# Altium PCB SLT.PcbDoc (part 4 of 8)
Units mm, origin at the board's own origin, x right, y up, seen from the top; angles counter-clockwise.
Board outline 150 x 66 mm, 6 copper layers (L1 TOP, L2 GND 1, L3 SIGNAL, L4 PWR, L5 GND 2, L6 BOT), stack 1.598 mm thick; 797 components, 541 nets, 2680 pads, 2120 vias.
Unrouted connection lines stored in the file: 31.
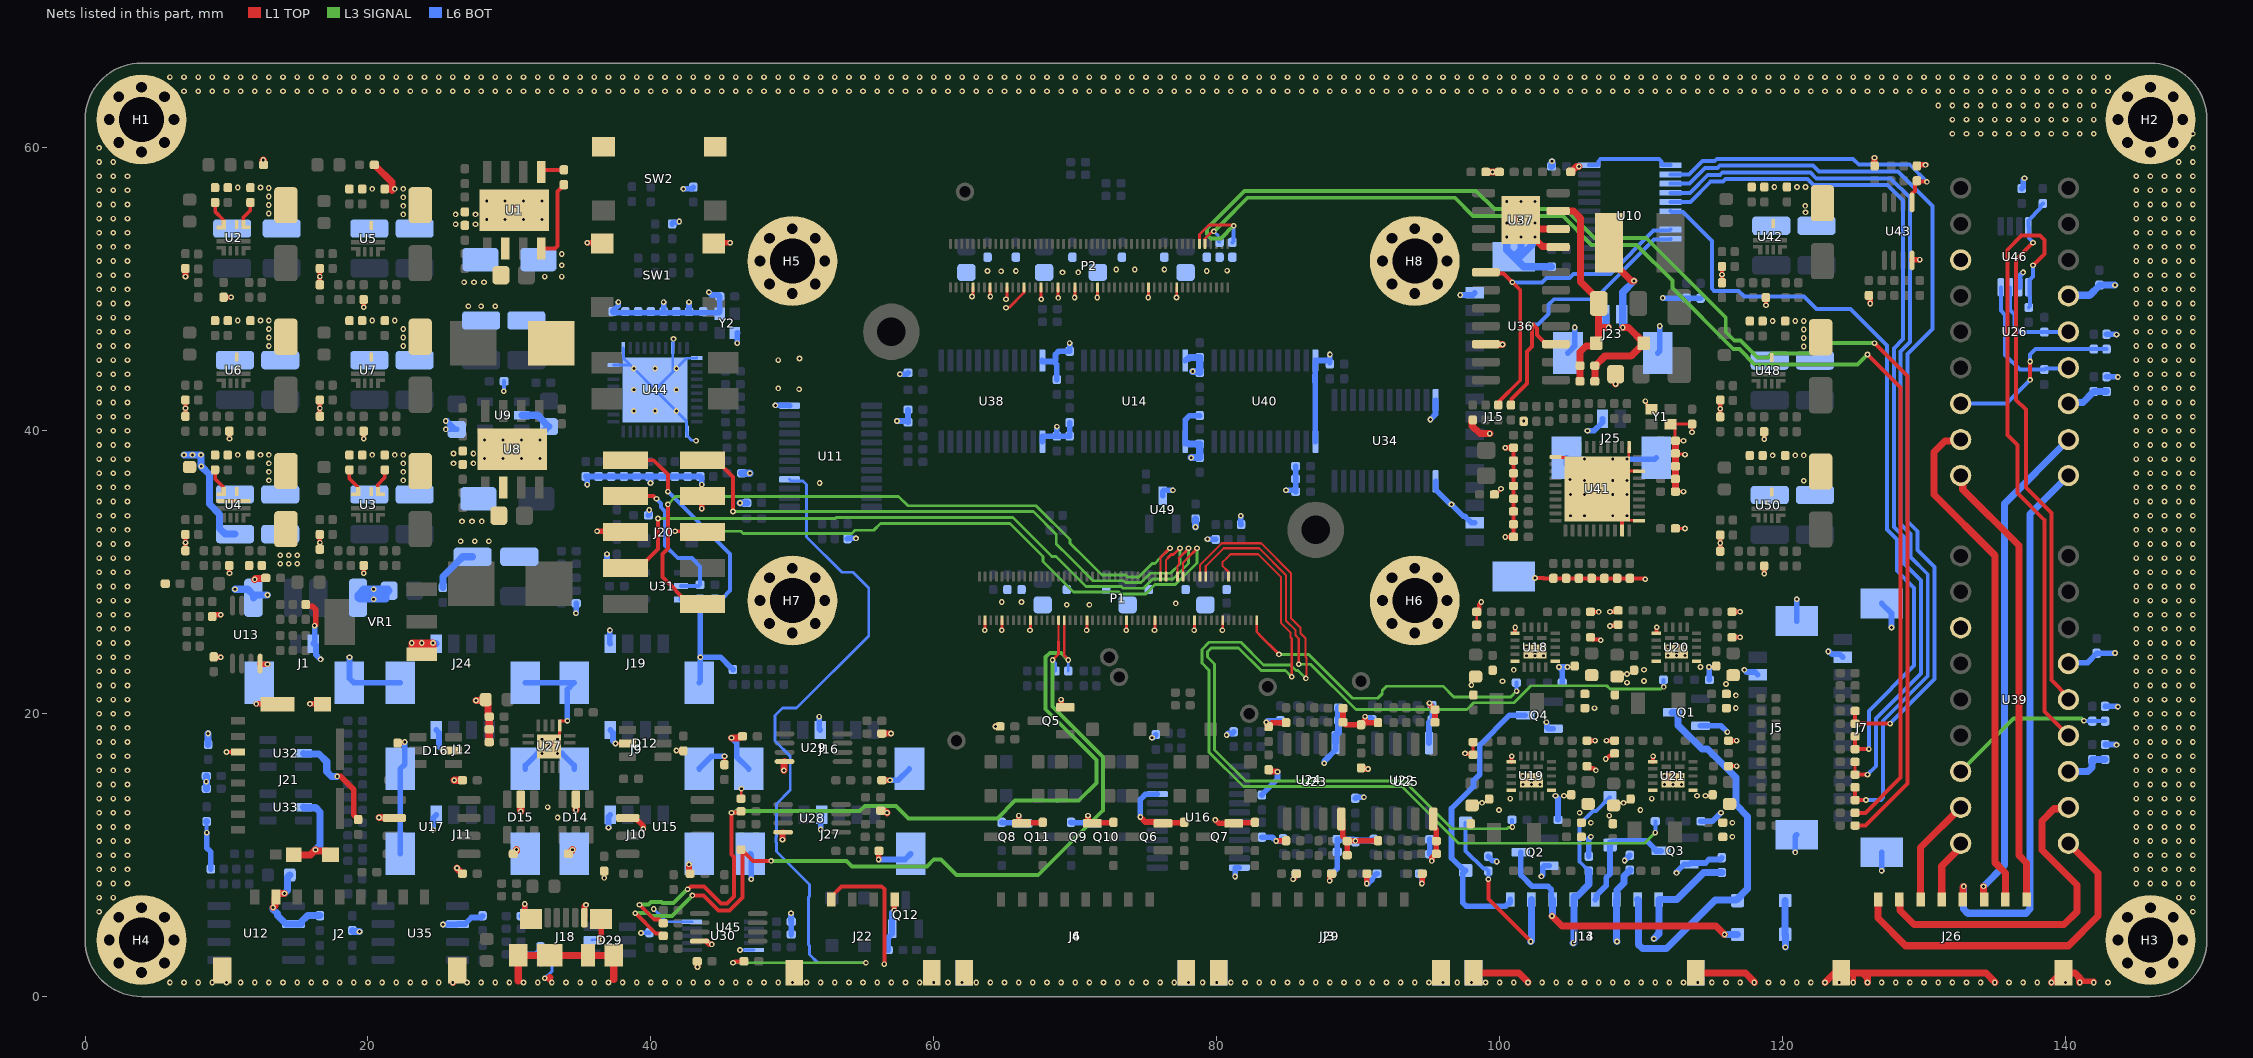
[diagram p8: the nets of this part, all layers, seen from the top]

## Via types
v1: diameter 0.4, hole 0.2, L1 TOP to L6 BOT, tented both sides, 2120 vias

## Nets (pads, with @x,y where several pads share a name; then routed paths per layer and width w, separated by ;. In a path a pad name is that pad's centre, name@x,y a point inside that pad or via, vN(x,y) a via of type N, cw(c..) or ccw(c..) an arc to the next point about the centre after c; other vN are vias at no path point) (continued)
GND: C2.1 C3.2 C4.1 C5.1 C6.1 C7.1 C8.1 C9.1 C10.1 C11.1 C12.1 C13.1 C14.1 C15.1 C16.1 C17.1 C18.1 C19.2 C20.1 C21.1 C22.1 C23.1 C24.1 C25.1 C26.1 C27.1 C29.1 C30.1 C31.1 C32.1 C33.1 C34.1 C35.2 C36.1 C37.2 C38.2 C39.1 C40.1 C41.1 C42.1 C43.1 C44.1 C45.1 C46.1 C47.1 C48.1 C49.1 C50.1 C51.1 C52.1 C53.1 C54.1 C55.1 C56.1 C57.1 C58.1 C59.1 C60.1 C61.1 C62.1 C63.1 C64.1 C65.2 C66.1 C67.1 C68.1 C69.2 C70.1 C71.1 C72.1 C73.1 C74.1 C75.1 C76.1 C77.1 C78.1 C79.1 C80.1 C81.1 C82.1 C83.1 C84.1 C85.1 C86.1 C87.1 C88.1 C89.1 C90.1 C91.1 C92.1 C93.1 C94.1 C95.1 C96.1 C97.1 C98.1 C99.1 C100.1 C101.1 C102.1 C103.1 C104.1 C105.1 C108.1 C109.1 C112.1 C113.1 C114.1 C115.1 C116.1 C117.1 C118.1 C119.1 C120.1 C121.1 C122.1 C123.1 C124.1 C125.1 C126.1 C127.1 C130.1 C131.1 C134.1 C135.1 C136.1 C137.1 C138.1 C139.1 C140.1 C141.1 C142.1 C143.1 C144.1 C145.1 C146.1 C147.1 C148.1 C149.1 C150.1 C151.1 C152.1 C153.1 C154.1 C155.1 C156.1 C157.1 C158.1 C159.1 C160.1 C161.1 C162.1 C163.1 C164.1 C165.1 C166.1 C167.1 C168.1 C169.1 C170.1 C171.1 C172.1 C173.1 C174.1 C175.1 C176.1 C177.1 C178.1 C179.1 C180.1 C181.1 C182.1 C183.1 C184.1 C185.1 C186.1 C187.1 C188.1 C189.1 C190.1 C191.1 C192.1 C193.1 C194.1 C195.1 C196.1 C197.2 C198.1 C199.1 C200.1 C201.1 C202.1 C204.1 C205.1 C206.2 C209.1 C210.1 C211.1 C212.1 C213.1 C214.1 C215.1 C216.1 C226.1 C227.1 C228.1 C229.1 C230.1 C231.1 C232.1 C233.1 C234.1 C235.1 C236.1 C237.1 C238.1 C239.1 C240.1 C241.2 C242.1 C243.1 C244.1 C245.1 C246.1 C247.1 C248.1 C249.1 C250.1 C255.1 C256.1 C257.1 C259.1 C260.2 C261.2 C262.2 C263.2 C264.2 C265.2 C266.2 C267.1 C278.1 C284.1 C285.1 C286.1 C287.1 C288.1 C289.1 C290.1 C291.1 C292.1 C293.1 D2.2 D3.2 D4.2 D5.2 D6.2 D7.2 D8.2 D10.2 D12.2 D13.2 D14.2 D15.2 D16.2 D29.2 D30.2 D31.2 H1.1 H2.1 H3.1 H4.1 H5.1 H6.1 H7.1 H8.1 J1.1 J1.M1 J1.M2 J2.2 J2.M1 J2.M2 J3.M1 J3.M2 J4.M1 J4.M2 J5.2 J5.M1 J5.M2 J6.M1 J6.M2 J7.2 J7.M1 J7.M2 J9.4 J9.M1 J9.M2 J10.4 J10.M1 J10.M2 J11.4 J11.M1 J11.M2 J12.4 J12.M1 J12.M2 J13.M1 J13.M2 J14.M1 J14.M2 J15.1 J15.14 J15.M1 J15.M2 J16.4 J16.M1 J16.M2 J18.5 J18.6 J19.4 J19.M1 J19.M2 J20.4 J20.8 J21.G1 J21.G2 J21.G3 J21.G4 J21.P6 J22.4 J22.M1 J22.M2 J23.M1 J23.M2 J24.4 J24.M1 J24.M2 J25.2 J25.M1 J25.M2 J26.M1 J26.M2 J27.4 J27.M1 J27.M2 J29.M1 J29.M2 P1.4 P1.10 P1.20 P1.40 P1.54 P1.64 P1.78 P1.88 P2.10 P2.16 P2.22 P2.28 P2.34 P2.40 P2.46 P2.54 P2.72 P2.82 Q1.2 Q2.2 Q3.2 Q4.2 Q5.2 Q6.2 Q7.2 Q8.2 Q9.2 Q10.2 Q11.2 Q12.2 R7.1 R8.1 R9.1 R10.1 R20.1 R22.2 R23.1 R24.2 R25.1 R26.1 R32.2 R34.1 R39.1 R40.2 R41.1 R42.1 R48.2 R49.1 R52.1 R53.1 R54.1 R56.1 R81.1 R108.1 R115.2 R116.2 R117.2 R118.2 R120.2 R121.2 R122.2 R135.2 R136.2 R137.2 R138.2 R145.2 R146.2 R147.2 R148.2 R151.1 R152.1 R155.1 R156.1 R161.1 R162.1 R167.1 R168.1 R173.1 R174.1 R179.1 R180.1 R183.1 R184.1 R187.1 R188.1 R202.1 R203.1 R204.1 R205.1 R206.1 R210.1 R211.1 R212.1 R221.2 R224.2 R225.1 R228.1 R229.1 R231.1 R244.1 R259.2 R263.2 R269.1 R274.2 R276.2 R283.2 R285.2 R306.1 R307.2 R308.1 R314.2 R320.2 R321.2 R329.1 R330.2 R331.1 R337.1 R338.2 R339.1 R341.2 R342.2 R344.2 R345.2 R346.2 R347.2 R356.1 SW1.1 SW1.3 SW2.1 SW2.3 U1.6 U1.9 U2.8 U3.8 U4.8 U5.8 U6.8 U7.8 U8.6 U8.9 U9.2 U10.12 U10.13 U11.12 U12.2 U13.4 U14.12 U14.13 U15.6 U16.12 U16.21 U17.6 U18.1 U18.5 U18.10 U18.21 U18.22 U19.1 U19.5 U19.10 U19.21 U19.22 U20.1 U20.5 U20.10 U20.21 U20.22 U21.1 U21.5 U21.10 U21.21 U21.22 U22.4 U23.4 U24.4 U25.4 U26.3 U26.15 U27.1 U27.17 U28.4 U29.4 U30.5 U30.10 U31.3 U32.2 U33.2 U34.12 U34.13 U35.2 U36.12 U37.1 U37.2 U37.EPAD U38.12 U38.13 U39.3 U39.15 U40.12 U40.13 U41.1 U41.8 U41.11 U41.21 U41.39 U41.41 U42.8 U43.4 U44.1 U44.8 U44.11 U44.21 U44.39 U44.41 U45.4 U46.6 U48.8 U49.3 U50.8 VR1.1 Y1.2 Y1.4 Y2.2 Y2.4 | length 530.8
  L1 TOP w0.2: v1(32.8,17.7) 33.55,18.45 33.55,19.455 33.58,19.485 34.085,19.485 v1(34.1,19.5) ; v1(36.7,8.4) C92.1@36.7,8.875 ; v1(37.5,17.9) D12.2@38.345,17.9 ; R117.2@45.2,16.4 v1(45.2,17) ; C188.1@46.375,14 46.388,14.012 46.388,14.688 v1(46.4,14.7) ; v1(62.7,49.5) 62.7,49.554 62.779,49.633 P2.10@62.779,50.14 ; v1(63.6,25.9) 63.625,25.925 P1.4@63.625,26.61 ; P2.16@63.979,50.14 63.979,49.521 v1(64,49.5) ; v1(64.8,25.9) 64.825,25.925 P1.10@64.825,26.61 ; v1(65.1,48.7) 65.138,48.738 65.352,48.738 66.379,49.766 P2.28@66.379,50.14 ; v1(65.1,49.3) 65.1,49.354 65.179,49.433 P2.22@65.179,50.14 ; v1(66.8,25.9) 66.825,25.925 P1.20@66.825,26.61 ; P2.34@67.579,50.14 67.579,49.321 v1(67.6,49.3) ; P2.40@68.779,50.14 68.779,49.421 v1(68.8,49.4) ; v1(69.954,49.43) 69.979,49.455 P2.46@69.979,50.14 ; v1(70.8,25.9) 70.825,25.925 P1.40@70.825,26.61 ; v1(71.554,49.43) 71.579,49.455 P2.54@71.579,50.14 ; v1(73.6,25.9) 73.625,25.925 P1.54@73.625,26.61 ; v1(75.154,49.43) 75.179,49.455 P2.72@75.179,50.14 ; v1(75.6,25.9) 75.625,25.925 P1.64@75.625,26.61 ; v1(77.154,49.43) 77.179,49.455 P2.82@77.179,50.14 ; v1(78.4,25.9) 78.425,25.925 P1.78@78.425,26.61 ; v1(80.4,25.9) 80.425,25.925 P1.88@80.425,26.61 ; C115.1@98.125,17.1 R138.2@98.125,18 ; C114.1@98.375,26.3 R136.2@98.375,27.2 ; C205.1@99.675,35.425 99.675,35.427 100.1,35.852 v1(100.1,35.9) ; U41.21@103.955,38.15 103.98,38.125 104.675,38.125 U41.41@106.9,35.9 ; U41.41@109.125,38.125 109.125,38.82 U41.11@109.15,38.845 ; U41.1@109.555,33.65 U41.1@109.845,33.65 109.82,33.675 109.125,33.675 108.65,34.15 U41.41@106.9,35.9 ; U41.8@109.845,37.15 108.15,37.15 U41.41@106.9,35.9 ; v1(110.3,42.1) 110.3,42.046 110.4,41.946 110.4,41.8 Y1.2@110.625,41.575 ; Y1.2@110.65,41.6 110.675,41.625 Y1.2@110.725,41.625 ; Y1.4@112.075,40.575 112.4,40.25 112.4,39.325 C181.1@112.425,39.3 v1(113,39.3) ; Y1.4@112.175,40.475 113.575,40.475 113.6,40.5 v1(113.6,39.9) ; C213.1@112.425,33.1 v1(113.1,33.1) ; C242.1@112.425,35.7 v1(113,35.7) ; C211.1@112.425,38.4 112.467,38.358 113.062,38.358 v1(113.1,38.32)
  L1 TOP w0.28: v1(10,17.3) J21.P6@10.802,17.3 ; v1(100.4,32.5) C77.1@100.975,32.5 C212.1@100.975,38.8 ; v1(102.5,29.6) 103.1,29.6 103.125,29.575 C76.1@103.8,29.575 C239.1@106.5,29.575 C236.1@107.4,29.575 C231.1@108.3,29.575 C230.1@109.2,29.575 110.193,29.575 110.26,29.508 v1(110.292,29.508) ; U41.39@108.65,32.955 U41.41@108.65,34.15
  L1 TOP w0.3: R23.1@7.1,31.525 v1(7.1,32.1) C21.1@7.1,32.575 ; R39.1@7.1,41.025 v1(7.1,41.6) C2.1@7.1,42.075 ; R7.1@9.793,49.44 v1@10.325,49.44 ; R24.2@10.2,30.475 10.204,30.471 10.204,29.939 v1(10.208,29.935) ; R40.2@10.2,39.975 10.204,39.971 10.204,39.439 v1(10.208,39.435) ; R20.1@16.6,31.625 v1(16.6,32.1) C18.1@16.6,32.575 ; R49.1@16.6,41.025 v1(16.6,41.6) C29.1@16.6,42.075 ; R34.1@16.6,50.325 v1(16.6,50.9) C240.1@16.6,51.375 ; R22.2@19.7,30.475 19.704,30.471 19.704,29.939 v1(19.708,29.935) ; R48.2@19.7,39.975 19.704,39.971 19.704,39.439 v1(19.708,39.435) ; R32.2@19.7,49.275 19.704,49.271 19.704,48.739 v1(19.708,48.735) ; C90.1@22.1,17.925 22.156,17.981 22.581,17.981 v1(22.6,18) ; v1(41.8,17.4) 41.813,17.387 42.287,17.387 C71.1@42.3,17.375 ; v1(97.55,17.2) 97.569,17.181 98.044,17.181 C115.1@98.125,17.1 ; R136.2@98.375,27.2 98.4,27.2 98.55,27.35 98.55,27.723 98.7,27.873 v1(98.7,27.9) ; U19.1@100.825,16.6 100.837,16.612 100.837,16.988 v1(100.85,17) ; U18.1@101.075,25.7 101.088,25.712 101.088,26.088 v1(101.1,26.1) ; R137.2@106.175,16.3 106.325,16.15 106.623,16.15 106.773,16 v1(106.8,16) ; C109.1@106.175,18.1 v1(106.75,18.1) ; R135.2@106.425,25.4 106.575,25.25 107.073,25.25 107.123,25.2 v1(107.15,25.2) ; C108.1@106.425,27.2 v1(107,27.2) ; v1(107.5,16.8) 107.527,16.8 107.777,17.05 107.975,17.05 C137.1@108.125,17.2 ; v1(107.55,18.1) R148.2@108.125,18.1 ; v1(107.8,26.2) 107.819,26.219 108.284,26.219 C136.1@108.375,26.31 ; v1(107.8,27.21) R146.2@108.375,27.21 ; U21.1@110.825,16.6 110.837,16.612 110.837,16.988 v1(110.85,17) ; U20.1@111.075,25.71 111.088,25.722 111.088,26.098 v1(111.1,26.11) ; R329.1@115.592,40.99 v1(115.592,41.565) C291.1@115.592,42.04 ; R337.1@115.593,31.49 v1(115.593,32.065) C286.1@115.593,32.54 ; R306.1@115.717,50.466 v1(115.717,51.041) C232.1@115.717,51.516 ; R147.2@116.175,16.3 v1(116.75,16.3) ; C131.1@116.175,18.1 v1(116.75,18.1) ; R145.2@116.425,25.41 v1(117,25.41) ; C130.1@116.425,27.21 v1(117,27.21) ; R330.2@118.692,39.94 118.696,39.936 118.696,39.404 v1(118.7,39.4) ; R338.2@118.693,30.44 118.697,30.436 118.697,29.904 v1(118.701,29.9) ; R307.2@118.817,49.416 118.821,49.412 118.821,48.88 v1(118.825,48.876)
  L1 TOP w0.4: v1(7.1,50.9) C237.1@7.1,51.475 ; C69.2@9,26.875 9,26.9 9.1,27 v1(9.6,27) ; C68.1@9.1,24.025 9.125,24 v1(9.6,24) ; v1(12.1,20.7) 13.582,20.7 J21.G4@13.607,20.675 ; U13.4@12.375,23.55 12.375,23.525 12.4,23.5 v1(12.9,23.5) ; R108.1@15.6,27.725 15.6,27.705 15.7,27.605 16.066,27.605 16.3,27.371 16.3,26.302 v1(16.231,26.233) ; v1(15.9,20.7) 16.767,20.7 J21.G3@16.792,20.675 ; v1(17.827,15.573) 18.074,15.573 19,14.648 19,12.85 19.3,12.55 C91.1@19.3,12.525 ; v1(31.08,6.556) 31.08,5.928 J18.6@31.512,5.495 ; J18.5@35.3,5.58 35.313,5.593 35.313,6.391 v1(35.411,6.489) ; v1(35.5,53.3) 36.5,53.3 SW1.1@36.55,53.25 ; v1(36.2,32.9) 38.14,32.9 J20.8@38.2,32.84 ; J18.6@36.487,5.495 36.487,4.134 v1(36.582,4.04) ; U15.6@38.365,12.635 38.89,12.635 39.471,12.054 39.471,11.853 v1(39.469,11.85) ; v1(42.7,9.35) 42.7,8.775 R118.2@42.775,8.7 ; R274.2@43.275,2.5 43.3,2.475 v1(43.3,2.1) ; v1(43.6,34.5) 43.6,35.319 J20.4@43.661,35.38 ; U45.4@43.95,3.9 44.15,3.7 v1(44.3,3.7) ; SW1.3@44.45,53.25 44.5,53.3 v1(45.6,53.3) ; v1(49.3,11.1) 49.3,11.6 49.325,11.625 U28.4@49.35,11.625 ; v1(56.1,9.7) 56.1,10.275 R221.2@56.125,10.3 ; R224.2@56.325,15.3 v1(56.9,15.3) ; C227.1@56.325,18.6 v1(56.975,18.6) ; v1(57.2,6.1) 57.2,6.82 J22.4@57.25,6.87 ; v1(64.354,19.1) R202.1@64.675,19.1 ; v1(66,12.8) 66,12.35 66.1,12.25 Q8.2@66.2,12.25 66.238,12.288 67.662,12.288 R205.1@67.7,12.325 ; v1(69,21) 69,20.55 69.1,20.45 Q5.2@69.3,20.45 ; v1(70.9,12.8) 70.9,12.35 71,12.25 Q9.2@71.2,12.25 71.238,12.288 72.663,12.288 R206.1@72.7,12.325 ; v1(74.6,12.7) 74.95,12.35 76.1,12.35 Q6.2@76.2,12.25 76.238,12.288 77.662,12.288 R203.1@77.7,12.325 ; v1(79.9,12.5) 80.15,12.25 Q7.2@81.2,12.25 81.238,12.287 82.663,12.287 R204.1@82.7,12.325 ; v1(83.5,19.4) 83.565,19.335 83.565,19.19 C151.1@83.665,19.09 ; C143.1@83.665,16.04 83.665,16.015 83.765,15.915 84.29,15.915 v1(84.3,15.905) ; C151.1@83.665,19.115 83.925,19.375 C157.1@84.9,19.375 ; v1(84.2,11) 84.225,11.025 C149.1@84.9,11.025 ; v1(85.4,8.3) 85.5,8.4 85.5,8.6 85.6,8.7 C158.1@85.625,8.7 ; v1(87.98,8.2) 87.98,8.38 88,8.4 88,8.6 88.1,8.7 C166.1@88.125,8.7 ; U23.4@88.805,12.565 88.9,12.47 88.9,11.325 C148.1@89.1,11.125 ; R168.1@88.925,20.4 C156.1@88.925,19.4 88.95,19.4 89.125,19.225 C153.1@90.2,19.225 90.2,19.25 C153.1@90.325,19.375 ; R162.1@89.225,10 C148.1@89.225,11 89.238,11.013 v1(89.8,11.013) 91.387,11.013 C165.1@91.4,11.025 ; C145.1@90.2,16.175 90.275,16.1 v1(90.7,16.1) ; v1(90.49,19.8) 90.49,19.54 C153.1@90.325,19.375 ; v1(90.6,8) 90.6,8.675 C142.1@90.625,8.7 ; C173.1@91.4,19.375 C153.1@90.325,19.375 ; v1(94.5,8) 94.525,8.025 C150.1@94.525,8.7 ; v1(95.043,20.75) 95.1,20.693 95.1,20.6 95.4,20.3 R180.1@95.425,20.3 C172.1@95.425,19.4 ; v1(95.2,9.6) 95.2,9.8 95.5,10.1 R174.1@95.525,10.1 C164.1@95.525,11 95.525,11.82 95.305,12.04 U25.4@95.305,12.565 ; v1(100.4,38.8) C212.1@100.975,38.8 ; C199.1@101.7,40.675 v1(101.7,40.7) ; v1(125,1) 125,1.68 ; C234.1@126.1,49.575 126.2,49.475 v1(126.2,49) ; C235.1@126.5,58.725 v1(126.5,59.3) ; U43.4@129.15,52.05 129.15,52.075 129.175,52.1 v1(129.7,52.1) ; R122.2@129.5,58.725 129.575,58.8 v1(130.1,58.8) ; 140.855,1.525 141.28,1.1 142,1.1 v1(142,1)
  L1 TOP w0.5: v1(12,29.5) 12.05,29.55 12.725,29.55 R54.1@12.775,29.6 ; v1(12.6,59.14) 12.6,58.825 R356.1@12.625,58.8 ; v1(13.3,6.3) 13.42,6.42 13.42,6.962 J2.2@13.5,7.042 13.5,7.22 13.58,7.3 v1(14.1,7.3) ; J21.G1@14.752,10.025 15.925,10.025 v1(16.29,10.39) 16.384,10.296 17.092,10.296 J21.G2@17.362,10.025 ; R9.1@20.45,58.8 20.475,58.8 21.7,57.575 21.7,57 ; v1(20.776,12.665) 21.835,12.665 U17.6@21.865,12.635 ; v1(25.3,17.4) D16.2@26.055,17.4 ; v1(26,1) 26,1.05 J2.M1@26.06,1.05 ; v1(26.1,15.3) R120.2@26.675,15.3 ; v1(26.3,9.1) 26.3,9.05 26.65,8.7 R121.2@26.675,8.7 ; v1(27.639,20.939) 28.264,20.939 C81.1@28.325,21 28.325,20.95 28.5,20.775 28.5,19.85 28.55,19.8 C82.1@28.575,19.8 R115.2@28.575,18.9 R116.2@28.575,18 ; C80.1@30.275,10.1 30.3,10.1 30.496,10.296 v1(30.496,10.396) ; 30.6,1.1 30.625,1.125 J18.6@30.625,2.92 J18.6@32.85,2.92 J18.6@35.549,2.92 J18.6@37.375,2.92 37.375,1.225 37.4,1.2 ; v1(30.8,13.1) D15.2@30.8,13.955 ; 32.8,1.3 32.85,1.35 ; C74.1@34.175,10.1 v1(34.465,10.39) ; v1(34.7,13.2) D14.2@34.7,13.955 ; v1(45.7,18.3) 46.191,18.3 46.241,18.35 46.425,18.35 C187.1@46.475,18.4 ; v1(49.4,16) 49.4,16.575 U29.4@49.45,16.625 ; C191.1@56.25,13.15 56.3,13.1 56.6,13.1 v1(56.7,13) ; C204.1@98,40.675 98.05,40.625 98.05,40.351 98.601,39.8 v1(99.3,39.8) ; J14.M1@98.145,1.68 101.37,1.68 102,1.05 v1(102,1) ; U36.12@99.025,46.13 99.055,46.1 v1(100.2,46.1) ; C228.1@99.025,58.3 v1(99.5,58.3) C209.1@99.975,58.3 ; v1(101.5,54.7) 101.5,54.557 101.657,54.4 101.8,54.4 v1(102.5,53.7) ; U37.EPAD@101.5,54.9 102.135,54.265 U37.2@104.135,54.265 ; U37.EPAD@102.6,53.8 102.6,53.457 103.027,53.03 104.1,53.03 U37.1@104.135,52.995 ; R269.1@105.025,58.3 105.05,58.3 105.43,58.68 v1(105.6,58.68) ; v1(108.2,43.3) C206.2@108.2,44 ; C242.1@112.425,35.7 C211.1@112.425,38.4 C181.1@112.425,39.3 ; J14.M2@113.855,1.68 117.37,1.68 118,1.05 v1(118,1) ; v1(123,1) 123.68,1.68 J26.M1@124.145,1.68 125,1.68 125.663,1.68 ; v1(126,1) 126,1.343 125.663,1.68 ; v1(135,1) 135,1.05 134.37,1.68 125.663,1.68 ; v1(139,1) 139.68,1.68 J26.M2@139.855,1.68 140.664,1.68 141,1.343 v1(141,1) ; 23.1,24.7 v1(23.1,25) v1(23.8,25) ; 23.1,24.7 23.8,24.7 ; 23.1,24.7 23.1,24.425 23.325,24.2 VR1.1@23.8,24.2 ; VR1.1@23.8,24.2 24.375,24.2 24.6,24.425 24.6,24.7 ; VR1.1@23.8,24.2 23.8,24.7 ; 23.8,24.7 24.6,24.7 ; 23.8,24.7 v1(23.8,25) ; v1(23.8,25) v1(24.6,25) 24.6,24.7
  L6 BOT w0.2: R228.1@30.825,3 30.925,3.1 31.8,3.1 32.2,3.5 R225.1@32.2,3.525 32.293,3.432 32.668,3.432 33,3.1 33,1.8 v1(32.5,1.3) ; D29.2@35.845,4 35.865,4.02 36.562,4.02 v1(36.582,4.04) ; U44.39@37.355,44.65 U44.41@38.55,44.65 ; U44.1@38.05,45.845 38.075,45.82 38.075,45.125 U44.41@38.55,44.65 ; v1(40.2,6.193) 41.093,5.3 U30.10@42.9,5.3 ; v1(41.6,46.5) 41.575,46.475 41.575,45.87 U44.8@41.55,45.845 U44.41@41.55,44.15 ; v1(43.2,39.3) 43.162,39.338 42.877,39.338 42.55,39.665 U44.21@42.55,39.955 42.525,39.98 42.525,40.675 v1(40.3,42.9) ; U44.11@43.245,45.15 43.22,45.125 42.525,45.125 U44.41@41.55,44.15 ; v1(46.3,3.3) U30.5@47.3,3.3 ; U44.41@38.55,44.65 v1(38.8,44.4) v1(40.3,42.9) ; v1(40.3,42.9) U44.41@41.55,44.15
  L6 BOT w0.28: v1(8.6,11.6) C192.1@8.6,12.375 ; U10.12@106.33,58.775 106.91,58.775 106.975,58.84 106.975,59.036 107.139,59.2 111.261,59.2 111.425,59.036 111.425,58.84 111.49,58.775 U10.13@112.07,58.775
  L6 BOT w0.3: v1(29.6,42.8) 29.612,42.813 29.612,43.487 C6.1@29.625,43.5 ; v1(39.3,4.5) 39.312,4.512 39.887,4.512 C10.1@39.9,4.525
  L6 BOT w0.4: v1(8.6,11.6) 8.6,10.525 8.9,10.225 R263.2@8.9,9.025 ; J1.1@16.125,24.95 J1.1@16.175,25 ; v1(16.231,26.233) 16.231,25.056 J1.1@16.175,25 ; v1(16.654,23.846) 16.325,24.175 16.325,24.85 J1.1@16.175,25 ; v1(18.7,24) 18.7,22.5 19,22.2 J24.M2@22.275,22.2 ; J11.M2@22.275,10.1 J12.M2@22.275,16.1 22.6,16.425 v1(22.6,18) ; v1(24.6,11.8) 24.625,11.825 24.625,12.65 J11.4@24.825,12.85 ; J12.4@24.825,18.85 25.025,18.65 25.025,17.675 v1(25.3,17.4) ; v1(25.3,5.1) 26.3,5.1 U35.2@26.335,5.135 26.86,5.135 27.325,5.6 28,5.6 28.1,5.7 C178.1@28.1,5.725 ; v1(25.5,40.1) C38.2@26.275,40.1 26.198,40.1 25.598,40.7 v1(25.5,40.7) ; R229.1@30.825,5.7 30.85,5.7 30.95,5.8 30.95,6.072 31.08,6.202 v1(31.08,6.556) ; J12.M1@31.125,16.1 31.125,16.35 31.975,17.2 v1(32.3,17.2) v1(32.8,17.7) ; J24.M1@31.125,22.2 J19.M2@34.575,22.2 34.1,21.725 v1(34.1,19.5) ; v1(32.3,18.2) v1(32.8,17.7) ; v1(33.4,18.2) 32.9,17.7 v1(32.8,17.7) ; J9.M2@34.575,16.1 34.575,16.35 33.725,17.2 v1(33.4,17.2) 33.3,17.2 v1(32.8,17.7) ; v1(34.7,27.1) 34.725,27.125 C267.1@34.725,27.8 ; v1(35.5,36.2) 35.5,36.675 C85.1@35.4,36.775 C86.1@37.2,36.775 C246.1@43.5,36.775 43.6,36.675 v1(43.6,36.2) ; v1(36.9,31.285) 36.9,30.872 36.95,30.822 36.95,30.125 37.05,30.025 C197.2@37.075,30.025 ; v1(37,11.95) 37,12.725 J10.4@37.125,12.85 ; v1(37.1,25.9) 37.1,24.975 J19.4@37.125,24.95 ; J9.4@37.125,18.85 37.325,18.65 37.325,18.075 v1(37.5,17.9) ; v1(37.7,49.1) 37.7,48.85 37.3,48.45 C245.1@37.3,48.425 37.375,48.35 44.8,48.35 44.875,48.425 C184.1@44.875,49.5 44.775,49.6 44.3,49.6 v1(44.1,49.8) ; C190.1@39.825,34.025 39.881,34.081 v1(39.881,34.408) ; C89.1@39.9,36.775 39.969,36.706 v1(39.969,36.314) ; C248.1@40.9,48.425 v1(40.9,49.1) ; C39.1@41.5,54.625 41.5,54.65 41.6,54.75 41.95,54.75 v1(42,54.8) ; U31.3@42.14,28.085 42.143,28.088 43.438,28.088 43.5,28.027 v1(43.5,24) ; v1(42.3,57.1) 42.9,57.1 43,57.2 C40.1@43,57.225 ; C243.1@42.7,48.425 v1(42.7,49.1) ; J9.M1@43.425,16.1 43.425,16.15 44.275,17 v1(45.2,17) ; J19.M1@43.425,22.2 43.5,22.275 v1(43.5,24) ; v1(45.7,18.3) 46.075,17.925 46.075,16.95 J16.M1@46.925,16.1 ; C278.1@45.8,23.125 45.8,23.15 45.7,23.25 45.675,23.25 44.925,24 v1(43.5,24) ; v1(46.1,46.2) 46.1,46.9 Y2.2@46.125,46.925 ; J27.M1@47.025,10.1 47.1,10.025 v1(47.1,8.3) ; v1(48.8,41.8) 49.775,41.8 U11.12@49.8,41.775 ; v1(49.9,5.9) 49.9,5.325 C189.1@49.925,5.3 R231.1@49.925,4.4 ; v1(51.9,19.8) 51.9,18.925 J16.4@51.975,18.85 ; v1(52,11.82) 52,12.775 J27.4@52.075,12.85 ; C64.1@53.9,32.375 53.925,32.4 v1(54.5,32.4) ; v1(56.1,9.7) 57.975,9.7 J27.M2@58.375,10.1 ; R212.1@56.775,3.3 56.775,4.165 57.05,4.44 Q12.2@57.05,4.8 57.05,5.95 v1(57.2,6.1) ; v1(56.9,15.3) 57.475,15.3 J16.M2@58.275,16.1 ; v1(57.4,40.7) 58.075,40.7 C201.1@58.175,40.6 R342.2@58.175,41.5 ; v1(57.6,44) 58.075,44 C183.1@58.175,44.1 ; R211.1@64.8,12.325 64.838,12.287 66,12.287 v1(66,12.8) ; U38.13@67.675,39.23 67.675,39.62 67.68,39.625 R314.2@68.7,39.625 ; U38.12@67.675,44.97 67.675,44.905 67.68,44.9 68.466,44.9 ; v1(68.7,40.3) R314.2@68.7,39.625 ; R344.2@68.7,43.625 68.7,44.666 68.466,44.9 ; R320.2@69.6,40.575 C41.1@69.6,39.625 R314.2@68.7,39.625 ; v1(69.6,46.2) C27.1@69.6,45.625 68.834,45.625 68.6,45.391 68.6,45.034 68.466,44.9 ; R210.1@69.7,12.325 69.738,12.288 Q10.2@70.962,12.288 ; v1(70.9,12.8) 70.9,12.35 Q10.2@70.962,12.288 ; Q10.2@71.2,12.25 71,12.25 Q10.2@70.962,12.288 ; v1(74.6,12.7) 74.6,13.95 74.95,14.3 75.775,14.3 U16.21@75.8,14.325 ; v1(75.42,18.3) 75.5,18.3 75.7,18.5 C70.1@75.7,18.525 ; U49.3@76.175,35.421 76.175,35.7 76.275,35.8 v1(76.9,35.8) ; U14.12@77.775,44.97 77.9,45.095 U14.12@77.9,45.1 ; 78.025,39.075 77.78,39.075 77.775,39.08 U14.13@77.775,39.23 77.775,40.775 78.075,41.075 R347.2@78.8,41.075 ; v1(79.343,32.343) 79.903,32.343 C229.1@79.921,32.325 ; v1(80.7,18.5) 80.8,18.6 81.1,18.6 81.2,18.7 C72.1@81.2,18.725 ; v1(81.3,8.5) 81.3,9.1 81.325,9.125 U16.12@81.6,9.125 ; v1(81.7,34) 81.7,33.396 R276.2@81.721,33.375 ; C159.1@83.195,14.26 83.195,14.285 84.3,15.39 v1(84.3,15.905) ; C169.1@83.2,11.275 83.925,11.275 v1(84.2,11) 84.535,11 84.57,11.035 84.595,11.035 84.695,11.135 C171.1@84.695,11.16 ; v1(83.5,19.4) 83.61,19.51 C163.1@84.495,19.51 ; v1(84.9,35.8) 85.475,35.8 C210.1@85.575,35.7 R321.2@85.575,36.6 R341.2@85.575,37.5 ; v1(85.4,8.3) 85.5,8.4 85.5,8.6 85.6,8.7 C144.1@85.625,8.7 ; U40.13@86.975,39.23 86.975,43.447 86.95,43.472 86.95,43.928 86.975,43.953 U40.12@86.975,44.97 87.88,44.97 87.9,44.95 87.9,44.925 88,44.825 v1(88,45.4) ; v1(87.6,16.5) 87.6,16.645 88.4,17.445 U24.4@88.4,17.97 ; v1(87.98,8.2) 87.98,8.555 88,8.575 88,8.6 88.1,8.7 C168.1@88.125,8.7 88.15,8.7 88.52,9.07 R179.1@88.52,10.235 C170.1@88.52,11.135 89.64,11.135 89.763,11.013 v1(89.8,11.013) 89.825,11.038 91.013,11.038 C155.1@91.1,11.125 ; C161.1@89.8,14.025 89.875,14.1 v1(90.4,14.1) ; v1(90.49,19.8) 90.59,19.7 90.9,19.7 91,19.6 C147.1@91,19.575 ; v1(90.6,8) 90.7,8 91,8.3 91,8.4 91.3,8.7 C160.1@91.325,8.7 ; C152.1@94.325,8.7 94.35,8.7 94.45,8.6 94.45,8.575 94.5,8.525 v1(94.5,8) ; U22.4@95.005,17.935 C146.1@95.005,19.405 ; C154.1@95.05,11.125 R167.1@95.05,10.075 95.075,10.075 95.175,9.975 95.175,9.95 95.2,9.925 v1(95.2,9.6) ; v1(95.1,40.8) 95.47,41.17 95.47,42.165 U34.12@95.475,42.17 ; C146.1@95.225,19.6 R161.1@95.225,20.6 ; U34.13@95.475,36.43 95.475,35.85 96.525,34.8 v1(96.6,34.8) 96.6,34.784 97.434,33.95 97.55,33.95 98,33.5 J15.14@98.25,33.5 ; v1(97.21,49.6) 98.1,49.6 J15.1@98.25,49.75 ; C141.1@99.2,9.925 99.2,9.9 99.5,9.6 99.75,9.6 v1(99.8,9.55) ; v1(102.95,8.503) 103.05,8.603 103.05,9.15 103.15,9.25 Q2.2@103.5,9.25 ; v1(103.301,19.398) 103.34,19.359 103.34,19.05 103.44,18.95 Q4.2@103.8,18.95 ; v1(103.95,14.2) 104.125,14.025 R152.1@104.125,12.5 ; R156.1@104.425,22.2 104.425,23.075 v1(104.2,23.3) v1(104.8,23.3) ; J23.M1@104.825,45.5 105.31,45.985 v1(105.31,47.3) ; v1(106,36.5) 105.875,36.5 104.725,37.65 J25.M1@104.725,38.1 104.825,38 v1(106,38) ; v1(106.213,40.004) 106.679,40.004 107.275,40.6 J25.2@107.275,40.85 ; C139.1@106.3,9.925 106.3,11.15 v1(106.45,11.3) ; v1(108.833,9.63) 108.878,9.675 108.9,9.675 109.2,9.975 C140.1@109.2,10 ; v1(109,38) 110.975,38 J25.M2@111.075,38.1 ; J23.M2@111.175,45.5 111.315,45.64 v1(111.315,47.415) ; v1(111.525,49.4) 111.55,49.375 C62.1@113.2,49.375 R283.2@114.2,49.375 ; v1(112.5,8.75) 112.5,8.81 113.04,9.35 Q3.2@113.4,9.35 113.5,9.45 114.55,9.45 114.8,9.7 115.6,9.7 115.7,9.8 C138.1@115.7,9.825 ; Q1.2@114.2,19.15 115.65,19.15 v1(116.1,18.7) ; R155.1@114.225,12.4 115.05,12.4 v1(115.65,13) ; v1(114.8,23.31) 114.825,23.285 R151.1@114.825,22.4 ; v1(117.3,23.1) 117.45,22.95 118.05,22.95 J5.2@118.25,22.75 ; v1(120.9,10.2) 120.9,11.35 J5.M1@121,11.45 ; J5.M2@121,26.55 v1(121,28.1) ; v1(123.23,24.4) 123.308,24.4 123.508,24.2 124.05,24.2 J7.2@124.25,24 ; v1(127,8.9) J7.M1@127,10.2 ; J7.M2@127,27.8 127.7,27.1 v1(127.7,26.1) ; U46.6@136.725,50.147 136.746,50.169 136.746,50.946 v1(137,51.2) ; C200.1@136.9,57.125 137,57.225 137,57.76 v1(137.1,57.86) ; U39.15@140.21,23.54 140.28,23.61 141.56,23.61 142.2,24.25 C174.1@142.2,24.275 143.475,24.275 v1(143.5,24.3) ; R187.1@142.8,17.825 143.575,17.825 v1(143.6,17.8) ; R183.1@142.8,20.525 143.675,20.525 v1(143.7,20.5) ; R184.1@142.9,43.825 143.675,43.825 v1(143.7,43.8) ; R188.1@142.9,46.825 143.575,46.825 v1(143.6,46.8)
  L6 BOT w0.5: C194.1@8.575,14.7 v1(8.575,15.2) C195.1@8.575,15.6 ; C193.1@8.7,17.825 v1(8.7,18.6) ; v1(10.6,28.8) 11.5,28.8 11.9,28.4 C259.1@11.9,28.2 12.1,28.4 v1(12.9,28.4) ; v1(13.3,6.3) 13.3,6.175 13.598,5.877 13.598,5.747 14.21,5.135 U12.2@14.735,5.135 15.26,5.135 15.305,5.18 15.305,5.31 15.72,5.725 C66.1@16.6,5.725 ; v1(14.1,7.3) 14.3,7.5 14.3,8.425 C67.1@14.475,8.6 ; U33.2@15.455,13.4 15.5,13.355 16.307,13.355 16.6,13.062 16.6,10.7 v1(16.29,10.39) ; U32.2@15.455,17.2 15.5,17.155 16.545,17.155 17.09,16.61 17.09,15.91 17.427,15.573 v1(17.827,15.573) ; R259.2@18.9,4.675 18.9,4.65 18.95,4.6 v1(19.4,4.6) ; v1(23.8,25) 23.85,24.95 J24.4@24.825,24.95 ; C32.1@25.3,28.925 25.3,29.7 26.3,30.7 26.7,31.1 C48.1@27.4,31.1 ; U9.2@30.875,41.1 32,41.1 32.4,40.7 32.4,40.65 C37.2@32.75,40.3 ; U8.9@32.15,39.35 32.15,39.65 32.4,39.9 32.4,39.95 C37.2@32.75,40.3 ; C37.2@32.8,40.3 C37.2@32.75,40.3 ; v1(46.3,34.9) C63.1@46.775,34.9 ; C244.1@46.425,37 v1(47,37) ; 78,39.1 78.025,39.075 R345.2@78.8,39.075 C198.1@78.8,38.125 78.789,38.114 78.214,38.114 v1(78.2,38.1) ; 78,45.1 78.075,45.175 C186.1@78.8,45.175 R346.2@78.8,44.15 ; v1(78.3,44.2) 78.75,44.2 R346.2@78.8,44.15 ; v1(78.5,33.2) C256.1@78.5,33.775 ; R346.2@78.8,44.125 R346.2@78.8,44.15 ; U24.4@88.4,17.97 88.4,18.495 88.595,18.69 C162.1@88.595,19.535 ; C162.1@88.62,19.535 R173.1@88.62,20.435 ; C61.1@103.675,51.6 101.7,51.6 J15.M2@101,52.3 ; R285.2@103.675,58.7 103.7,58.725 v1(103.7,59.05) ; U26.15@140.21,49.54 140.255,49.585 141.71,49.585 142.4,50.275 C176.1@142.4,50.3 v1(143.5,50.3) ; C238.1@19.3,28.2 19.3,28.4 C238.1@19.7,28.8 ; C238.1@19.3,28.2 C238.1@19.5,28.4 ; C238.1@19.3,28.2 19.4,28.1 v1(20.4,28.1) 21.282,28.1 C35.2@21.282,28.4 ; C238.1@19.5,28.4 19.7,28.6 C238.1@19.7,28.8 ; C238.1@19.5,28.4 19.7,28.4 C35.2@21.282,28.4 ; C238.1@19.7,28.8 v1(20.4,28.8) 21.4,28.8 C35.2@21.5,28.7 21.282,28.482 C35.2@21.282,28.4 ; v1(100.5,54.7) v1(101.5,54.7) ; v1(100.5,54.7) v1(100.5,56.2) v1(101.5,56.2) ; v1(100.5,54.7) v1(100.5,53.7) 100.5,52.8 J15.M2@101,52.3 ; J15.M2@101,52.3 101.5,52.8 v1(101.5,53.7) v1(101.5,54.7) ; J15.M2@101,52.3 101.45,52.3 102.5,53.35 v1(102.5,53.7) v1(102.5,54.7) ; v1(101.5,54.7) v1(101.5,56.2) ; v1(101.5,54.7) v1(102.5,54.7) ; v1(101.5,56.2) v1(102.5,56.2) v1(102.5,54.7)
  other v1: 6,1 7,1 8,1 9,1 10,1 11,1 12,1 13,1 14,1 15,1 16,1 17,1 18,1 19,1 20,1 21,1 22,1 23,1 24,1 25,1 27,1 28,1 29,1 30,1 31,1 32,1 33,1 34,1 35,1 36,1 37,1 38,1 39,1 40,1 41,1 42,1 43,1 44,1 45,1 46,1 47,1 48,1 49,1 50,1 51,1 52,1 53,1 54,1 55,1 56,1 57,1 58,1 59,1 60,1 61,1 62,1 63,1 64,1 65,1 66,1 67,1 68,1 69,1 70,1 71,1 72,1 73,1 74,1 75,1 76,1 77,1 78,1 79,1 80,1 81,1 82,1 83,1 84,1 85,1 86,1 87,1 88,1 89,1 90,1 91,1 92,1 93,1 94,1 95,1 96,1 97,1 98,1 99,1 100,1 101,1 103,1 104,1 105,1 106,1 107,1 108,1 109,1 110,1 111,1 112,1 113,1 114,1 115,1 116,1 117,1 119,1 120,1 121,1 122,1 124,1 127,1 128,1 129,1 130,1 131,1 132,1 133,1 134,1 136,1 137,1 138,1 140,1 143,1 1,6 149,6 1,7 2,7 148,7 149,7 1,8 2,8 3,8 145,8 146,8 147,8 148,8 149,8 1,9 2,9 3,9 145,9 146,9 147,9 148,9 149,9 1,10 2,10 3,10 145,10 146,10 147,10 148,10 149,10 1,11 2,11 3,11 145,11 146,11 147,11 148,11 149,11 116.45,11.3 1,12 2,12 3,12 145,12 146,12 147,12 148,12 149,12 106.45,12.3 116.45,12.3 33.411,12.664 107.75,12.8 1,13 2,13 3,13 105.65,13 145,13 146,13 147,13 148,13 149,13 99.95,13.2 109.95,13.2 32.7,13.4 98.75,13.7 108.75,13.7 1,14 2,14 3,14 100.75,14 110.75,14 145,14 146,14 147,14 148,14 149,14 104.55,14.2 113.95,14.2 114.55,14.2 1,15 2,15 3,15 101.65,15 102.25,15 102.85,15 111.65,15 112.25,15 112.85,15 145,15 146,15 147,15 148,15 149,15 101.65,15.6 102.25,15.6 102.85,15.6 111.65,15.6 112.25,15.6 112.85,15.6 1,16 2,16 3,16 145,16 146,16 147,16 148,16 149,16 1,17 2,17 3,17 145,17 146,17 147,17 148,17 149,17 1,18 2,18 3,18 145,18 146,18 147,18 148,18 149,18 1,19 2,19 3,19 145,19 146,19 147,19 148,19 149,19 1,20 2,20 3,20 145,20 146,20 147,20 148,20 149,20 106.7,20.4 116.7,20.41 1,21 2,21 3,21 145,21 146,21 147,21 148,21 149,21 116.7,21.3 1,22 2,22 3,22 145,22 146,22 147,22 148,22 149,22 98,22.03 116,22.1 109,22.2 100.2,22.3 110.2,22.31 109,22.81 1,23 2,23 3,23 145,23 146,23 147,23 148,23 149,23 101,23.1 110.2,23.11 114.2,23.31 1,24 2,24 3,24 145,24 146,24 147,24 148,24 149,24 101.9,24.1 102.5,24.1 103.1,24.1 111.9,24.11 112.5,24.11 113.1,24.11 101.9,24.7 102.5,24.7 103.1,24.7 111.9,24.71 112.5,24.71 113.1,24.71 1,25 2,25 3,25 145,25 146,25 147,25 148,25 149,25 1,26 2,26 3,26 145,26 146,26 147,26 148,26 149,26 1,27 2,27 3,27 145,27 146,27 147,27 148,27 149,27 69.4,27.7 71,27.7 77.1,27.8 64.8,27.9 66.2,27.9 1,28 2,28 3,28 145,28 146,28 147,28 148,28 149,28 1,29 2,29 3,29 145,29 146,29 147,29 148,29 149,29 1,30 2,30 3,30 145,30 146,30 147,30 148,30 149,30 1,31 2,31 3,31 145,31 146,31 147,31 148,31 149,31 1,32 2,32 3,32 145,32 146,32 147,32 148,32 149,32 26.55,32.2 27.55,32.2 28.55,32.2 1,33 2,33 3,33 145,33 146,33 147,33 148,33 149,33 26.65,33.6 27.35,33.6 28.05,33.6 1,34 2,34 3,34 105,34 106,34 108,34 109,34 145,34 146,34 147,34 148,34 149,34 1,35 2,35 3,35 145,35 146,35 147,35 148,35 149,35 105,35.5 106,35.5 108,35.5 109,35.5 1,36 2,36 3,36 145,36 146,36 147,36 148,36 149,36 51.927,36.309 121.493,36.465 13,36.5 22.5,36.5 108,36.5 109,36.5 104.961,36.558 1,37 2,37 3,37 145,37 146,37 147,37 148,37 149,37 13,37.1 22.5,37.1 13,37.7 22.5,37.7 26.05,37.7 27.45,37.7 1,38 2,38 3,38 108,38 145,38 146,38 147,38 148,38 149,38 119.294,38.265 120.893,38.265 121.493,38.265 10.801,38.3 12.4,38.3 13,38.3 20.301,38.3 21.9,38.3 22.5,38.3 26.05,38.4 27.45,38.4 1,39 2,39 3,39 145,39 146,39 147,39 148,39 149,39 1,40 2,40 3,40 145,40 146,40 147,40 148,40 149,40 1,41 2,41 3,41 145,41 146,41 147,41 148,41 149,41 38.8,41.4 40.3,41.4 41.8,41.4 1,42 2,42 3,42 145,42 146,42 147,42 148,42 149,42 38.8,42.9 41.8,42.9 50.482,42.945 1,43 2,43 3,43 49,43 145,43 146,43 147,43 148,43 149,43 1,44 2,44 3,44 145,44 146,44 147,44 148,44 149,44 40.3,44.4 41.8,44.4 1,45 2,45 3,45 49,45 145,45 146,45 147,45 148,45 149,45 50.509,45.112 121.492,45.965 1,46 2,46 3,46 13,46 22.5,46 145,46 146,46 147,46 148,46 149,46 121.492,46.565 13,46.6 22.5,46.6 1,47 2,47 3,47 145,47 146,47 147,47 148,47 149,47 121.492,47.165 13,47.2 22.5,47.2 119.293,47.765 120.892,47.765 121.492,47.765 10.801,47.8 12.4,47.8 13,47.8 20.301,47.8 21.9,47.8 1,48 2,48 3,48 145,48 146,48 147,48 148,48 149,48 27.1,48.8 28,48.8 29,48.8 1,49 2,49 3,49 145,49 146,49 147,49 148,49 149,49 10.329,49.444 1,50 2,50 3,50 145,50 146,50 147,50 148,50 149,50 26.8,50.5 27.5,50.5 28.2,50.5 1,51 2,51 3,51 145,51 146,51 147,51 148,51 149,51 69.1,51.2 70.208,51.199 64.76,51.285 63.8,51.3 65.8,51.3 79.3,51.3 80.732,51.323 72.9,51.4 74.2,51.4 76.3,51.4 1,52 2,52 3,52 145,52 146,52 147,52 148,52 149,52 1,53 2,53 3,53 145,53 146,53 147,53 148,53 149,53 1,54 2,54 3,54 145,54 146,54 147,54 148,54 149,54 26.2,54.6 27.6,54.6 1,55 2,55 3,55 145,55 146,55 147,55 148,55 149,55 22.5,55.3 26.2,55.3 27.6,55.3 12.993,55.365 121.617,55.441 22.5,55.9 121.6,55.9 12.993,55.965 1,56 2,56 3,56 145,56 146,56 147,56 148,56 149,56 22.5,56.5 12.993,56.565 1,57 2,57 3,57 145,57 146,57 147,57 148,57 149,57 20.301,57.1 21.9,57.1 22.5,57.1 12.993,57.165 10.8,57.2 12.4,57.2 119.418,57.241 121.017,57.241 121.617,57.241 1,58 2,58 3,58 145,58 146,58 147,58 148,58 149,58 1,59 2,59 148,59 149,59 1,60 149,60 132,61 133,61 134,61 135,61 136,61 137,61 138,61 139,61 140,61 141,61 142,61 149,61 132,62 133,62 134,62 135,62 136,62 137,62 138,62 139,62 140,62 141,62 142,62 131,63 132,63 133,63 134,63 135,63 136,63 137,63 138,63 139,63 140,63 141,63 142,63 7,64 8,64 9,64 10,64 11,64 12,64 13,64 14,64 15,64 16,64 17,64 18,64 19,64 20,64 21,64 22,64 23,64 24,64 25,64 26,64 27,64 28,64 29,64 30,64 31,64 32,64 33,64 34,64 35,64 36,64 37,64 38,64 39,64 40,64 41,64 42,64 43,64 44,64 45,64 46,64 47,64 48,64 49,64 50,64 51,64 52,64 53,64 54,64 55,64 56,64 57,64 58,64 59,64 60,64 61,64 62,64 63,64 64,64 65,64 66,64 67,64 68,64 69,64 70,64 71,64 72,64 73,64 74,64 75,64 76,64 77,64 78,64 79,64 80,64 81,64 82,64 83,64 84,64 85,64 86,64 87,64 88,64 89,64 90,64 91,64 92,64 93,64 94,64 95,64 96,64 97,64 98,64 99,64 100,64 101,64 102,64 103,64 104,64 105,64 106,64 107,64 108,64 109,64 110,64 111,64 112,64 113,64 114,64 115,64 116,64 117,64 118,64 119,64 120,64 121,64 122,64 123,64 124,64 125,64 126,64 127,64 128,64 129,64 130,64 131,64 132,64 133,64 134,64 135,64 136,64 137,64 138,64 139,64 140,64 141,64 142,64 143,64 6,65 7,65 8,65 9,65 10,65 11,65 12,65 13,65 14,65 15,65 16,65 17,65 18,65 19,65 20,65 21,65 22,65 23,65 24,65 25,65 26,65 27,65 28,65 29,65 30,65 31,65 32,65 33,65 34,65 35,65 36,65 37,65 38,65 39,65 40,65 41,65 42,65 43,65 44,65 45,65 46,65 47,65 48,65 49,65 50,65 51,65 52,65 53,65 54,65 55,65 56,65 57,65 58,65 59,65 60,65 61,65 62,65 63,65 64,65 65,65 66,65 67,65 68,65 69,65 70,65 71,65 72,65 73,65 74,65 75,65 76,65 77,65 78,65 79,65 80,65 81,65 82,65 83,65 84,65 85,65 86,65 87,65 88,65 89,65 90,65 91,65 92,65 93,65 94,65 95,65 96,65 97,65 98,65 99,65 100,65 101,65 102,65 103,65 104,65 105,65 106,65 107,65 108,65 109,65 110,65 111,65 112,65 113,65 114,65 115,65 116,65 117,65 118,65 119,65 120,65 121,65 122,65 123,65 124,65 125,65 126,65 127,65 128,65 129,65 130,65 131,65 132,65 133,65 134,65 135,65 136,65 137,65 138,65 139,65 140,65 141,65 142,65 143,65
HD_2_A0: R186.2 R188.2 U26.7 | length 13
  L1 TOP w0.28: v1(137.5,43.6) v1(137.5,44.9)
  L6 BOT w0.28: U26.7@132.59,41.92 135.82,41.92 v1(137.5,43.6) ; v1(137.5,44.9) 137.5,45.4 137.875,45.775 R186.2@142,45.775 R188.2@142.9,45.775
HD_2_A1: R182.2 R184.2 U26.12 | length 3.1
  L6 BOT w0.5: U26.12@140.21,41.92 140.303,42.013 141.238,42.013 141.925,42.7 141.95,42.7 142,42.75 R182.2@142,42.775 R184.2@142.9,42.775
HD_2_P1+: J26.7 U26.8 | length 36
  L1 TOP w0.5: U26.8@132.59,39.38 132.484,39.274 131.474,39.274 130.707,38.507 130.707,35.493 135,31.2 135,9.5 135.75,8.75 J26.7@135.75,6.87
HD_2_P1-: J26.8 U26.9 | length 31.9
  L1 TOP w0.5: U26.9@132.59,36.84 132.736,36.694 132.736,35.864 136.7,31.9 136.7,10 137.25,9.45 J26.8@137.25,6.87
HD_2_P2+: J26.6 U26.11 | length 35
  L1 TOP w0.5: v1(134.2,7.8) 134.2,6.92 J26.6@134.25,6.87
  L6 BOT w0.5: v1(134.2,7.8) 135.7,9.3 135.7,34.87 U26.11@140.21,39.38
HD_2_P2-: J26.5 U26.10 | length 39.3
  L1 TOP w0.5: J26.5@132.75,6.87 132.75,7.75 v1(132.8,7.8)
  L6 BOT w0.5: v1(132.8,7.8) 132.8,6.193 133.093,5.9 137.207,5.9 137.5,6.193 137.5,34.13 U26.10@140.21,36.84
HD_2_SCL: R357.2 U26.13 U46.8 | length 9.9
  L6 BOT w0.28: U46.8@135.425,50.147 135.425,48.496 135.725,48.196 135.725,45.375 136.775,44.325 R357.2@138.5,44.325 138.568,44.392 140.142,44.392 U26.13@140.21,44.46
HD_2_SDA: R358.2 U26.14 U46.7 | length 6.9
  L6 BOT w0.28: U46.7@136.075,50.147 136.075,48.528 136.375,48.228 136.375,47.325 136.725,46.975 R358.2@138.5,46.975 138.512,46.987 140.197,46.987 U26.14@140.21,47
HD_A0: R181.2 R183.2 U39.7 | length 11.8
  L3 SIGNAL w0.28: U39.7@132.59,15.92 136.32,19.65 141.118,19.65 141.268,19.5 v1(141.3,19.5)
  L6 BOT w0.28: v1(141.3,19.5) 141.313,19.487 141.887,19.487 R181.2@141.9,19.475 R183.2@142.8,19.475
HD_A1: R185.2 R187.2 U39.12 | length 3.3
  L6 BOT w0.5: U39.12@140.21,15.92 141.571,15.92 141.864,16.213 141.864,16.739 R185.2@141.9,16.775 R187.2@142.8,16.775
HD_I2C_EN: R122.1 U10.14 U43.5 | length 21.7
  L1 TOP w0.28: U43.5@129.15,56.15 129.163,56.163 129.163,56.763 129.346,56.946 129.346,57.521 R122.1@129.5,57.675 129.552,57.623 130.177,57.623 v1(130.2,57.6)
  L6 BOT w0.28: U10.14@112.07,58.125 113.389,58.125 114.324,59.06 115.189,59.06 115.359,59.23 124.977,59.23 125.397,58.81 128.99,58.81 v1(130.2,57.6)
HD_P1+: J26.3 U39.8 | length 7.7
  L1 TOP w0.5: J26.3@129.75,6.87 129.75,10.54 U39.8@132.59,13.38
HD_P1-: J26.4 U39.9 | length 4.5
  L1 TOP w0.5: J26.4@131.25,6.87 131.25,9.25 132.59,10.59 U39.9@132.59,10.84
HD_P2+: J26.2 U39.11 | length 23.8
  L1 TOP w0.5: J26.2@128.25,6.87 128.3,6.82 128.3,6.1 129.3,5.1 139.9,5.1 140.8,6 140.8,7.9 138.33,10.37 138.33,12.43 139.184,13.284 140.114,13.284 U39.11@140.21,13.38
HD_P2-: J26.1 U39.10 | length 24.6
  L1 TOP w0.5: J26.1@126.75,6.87 126.75,5.55 128.7,3.6 140.2,3.6 142.3,5.7 142.3,8.75 U39.10@140.21,10.84
HD_SCL: R359.2 U39.13 U46.5 | length 44.5
  L1 TOP w0.28: v1(137.7,51.7) 138.5,52.5 138.5,53.5 138.2,53.8 136.9,53.8 135.9,52.8 135.9,39.7 136.6,39 136.6,35.6 138.52,33.68 138.52,20.15 U39.13@140.21,18.46
  L6 BOT w0.28: R359.2@137.4,48.725 137.5,48.825 137.5,49.469 137.464,49.506 137.464,50.661 137.7,50.898 v1(137.7,51.7)
HD_SDA: R360.2 U39.14 U46.4 | length 37.7
  L1 TOP w0.28: v1(137.7,53.3) 136.51,52.11 136.51,42.19 137.2,41.5 137.2,36 139,34.2 139,22.374 140.21,21.164 U39.14@140.21,21
  L6 BOT w0.28: v1(137.7,53.3) 137.7,53.332 137.402,53.63 137.402,54.425 U46.4@137.375,54.453 137.375,54.878 138.246,55.749 138.246,55.921 R360.2@138.4,56.075
Heat_I2C4_EN: R273.2 U11.4 | length 56.4
  L1 TOP w0.28: v1@45.932,2.5 R273.2@46.575,2.5
  L3 SIGNAL w0.2: v1(45.8,2.4) v1(55.2,2.4)
  L6 BOT w0.2: U11.4@49.8,36.575 49.917,36.458 50.742,36.458 51,36.2 51,32.5 53.5,30 54.3,30 55.4,28.9 55.4,25.5 50.3,20.4 49.3,20.4 48.775,19.875 48.775,18.076 49.85,17.001 49.85,14.599 48.875,13.624 48.875,11.311 48.85,11.286 48.85,10.914 48.875,10.889 48.875,10.275 51.223,7.927 51.223,7.101 51.15,7.028 51.15,3.672 51.223,3.599 51.223,2.977 51.8,2.4 v1(55.2,2.4)
HEATER_A_1: C26.2 C31.2 C138.2 C139.2 C140.2 C141.2 D5.1 D32.1 D33.1 D34.1 D35.1 J13.1 J13.3 J13.5 J13.7 J22.1 JP3.2 R16.2 R17.2 U4.6 | length 60.3
  L1 TOP w0.28: J22.1@52.75,6.87 52.75,7.07 53.48,7.8 56.3,7.8 56.5,7.6 v1(56.5,2.3) ; v1(99.2,8.3) 99.2,6.9 v1(102.2,3.9)
  L6 BOT w0.28: D34.1@97.597,12.281 97.6,12.278 97.6,10.3 98.846,9.054 99.041,9.054 99.2,8.895 C141.2@99.2,8.875 v1(99.2,8.3) ; C139.2@106.3,8.875 106.3,8.9 105.66,9.54 105.66,12.203 106.594,13.137 106.828,13.137 107.772,14.081 D35.1@107.797,14.081
  L6 BOT w0.5: v1(7.001,38.3) v1(7.601,38.3) v1(8.201,38.3) 8.201,37.516 v1(8.217,37.5) 8.793,36.924 8.793,34.817 9.51,34.1 9.51,33.1 9.91,32.7 C26.2@10.6,32.7 ; v1(102.2,3.9) 102.25,3.95 J13.7@102.25,6.87 ; v1(105.2,3.8) 105.25,3.85 J13.5@105.25,6.87 105.25,7.07 105.3,7.12 105.5,7.12 106.3,7.92 C139.2@106.3,8.875 ; v1(108.3,3.9) 108.25,3.95 J13.3@108.25,6.87 108.3,6.92 108.3,7.535 108.8,8.035 108.8,8.525 109.2,8.925 C140.2@109.2,8.95 ; v1(110.9,4.1) 111.25,4.45 J13.1@111.25,6.87 112.523,6.87 114.427,8.775 C138.2@115.7,8.775 ; D32.1@120.181,6.803 120.181,4.403 120.2,4.384 v1(120.2,3.5)
  other v1: 13.8,30.6 14.4,30.6 15,30.6 13.8,31.2 14.4,31.2 15,31.2
HEATER_B_1: D32.2 J13.2 Q1.3 | length 27.9
  L6 BOT w0.5: J13.2@109.75,6.87 109.8,6.82 109.8,3.693 110.093,3.4 111.8,3.4 115.22,6.82 116.72,6.82 117.53,7.63 117.53,12.747 116.7,13.577 116.7,15.5 114.7,17.5 114.298,17.5 112.61,19.188 112.61,20.05 112.56,20.1 Q1.3@112.2,20.1
HEATER_B_2: D35.2 J13.4 Q3.3 | length 8.5
  L6 BOT w0.4: J13.4@106.75,6.87 106.85,6.97 106.85,7.17 107.525,7.845 107.525,8.403 107.8,8.678 D35.2@107.8,10.9 ; D35.2@107.8,10.72 108.05,10.97 108.279,10.97 108.309,11 110.406,11 110.94,10.466 110.94,10.4 111.04,10.3 Q3.3@111.4,10.3
HEATER_B_3: D33.2 J13.6 Q2.3 | length 19.8
  L1 TOP w0.5: v1(103.7,5.7) 104.4,5 115.3,5 v1(115.9,4.4)
  L6 BOT w0.4: Q2.3@101.5,10.2 101.5,8.6 102.3,7.8 103.416,7.8 103.65,7.566 103.65,6.97 J13.6@103.75,6.87
  L6 BOT w0.5: v1(103.7,5.7) 103.75,5.75 J13.6@103.75,6.87 ; v1(115.9,4.4) D33.2@116.82,4.4
HEATER_B_4: D34.2 J13.8 Q4.3 | length 20.3
  L6 BOT w0.4: D34.2@97.528,8.872 96.6,9.8 96.6,13.3 98.15,14.85 98.15,15.278 98.6,15.728 98.6,17.8 100.7,19.9 Q4.3@101.8,19.9 ; D34.2@97.6,8.92 97.4,8.72 97.4,6.634 97.634,6.4 100.416,6.4 100.586,6.57 100.65,6.57 100.75,6.67 J13.8@100.75,6.87
HEATER_PWM_1: P1.81 R149.1 | length 42.9
  L1 TOP w0.15: P1.81@79.225,29.69 79.225,30.426 79.799,31 80.499,31.7 82.995,31.7 84.9,29.795 84.9,26.581 85.575,25.906 85.575,25.534 85.8,25.309 v1(85.8,23.5)
  L3 SIGNAL w0.2: v1(85.8,23.5) 86.634,23.5 89.834,20.3 97.685,20.3 98.165,20.78 101.02,20.78 102.22,21.98 107.575,21.98 107.805,21.75 111.396,21.75 111.546,21.9 v1(111.6,21.9)
  L6 BOT w0.28: R149.1@111.575,22.4 111.588,22.387 111.588,21.912 v1(111.6,21.9)
HEATER_PWM_2: P1.79 R153.1 | length 67.9
  L1 TOP w0.15: P1.79@78.825,29.69 78.825,30.521 79.304,31 80.354,32.05 83.14,32.05 85.25,29.94 85.25,26.754 85.925,26.079 85.925,25.679 86.275,25.329 86.275,24.038 86.34,23.973 v1@86.34,22.681
  L3 SIGNAL w0.2: v1(86.3,22.5) 85.75,23.05 85.614,23.05 85.214,23.45 83.314,23.45 81.714,25.05 79.448,25.05 78.95,24.552 78.95,23.575 79.45,23.075 79.45,17.282 81.882,14.85 93.086,14.85 97.086,10.85 110.25,10.85 v1(111,11.6)
  L6 BOT w0.28: v1(111,11.6) R153.1@111,12.4
HEATER_PWM_3: P1.89 R150.1 | length 51.6
  L1 TOP w0.15: P1.89@80.825,29.69 80.8,29.715 80.8,30.054 80.4,30.454 80.4,30.7 80.7,31 80.975,31.275 82.925,31.275 84.55,29.65 84.55,26.41 85.225,25.735 85.225,25.389 85.3,25.314 v1(85.3,22.62)
  L3 SIGNAL w0.2: v1(85.3,22.62) 84.87,23.05 83.148,23.05 81.548,24.65 79.614,24.65 79.35,24.386 79.35,24.014 79.85,23.514 79.85,17.448 82.048,15.25 93.252,15.25 96.632,11.87 100.501,11.87 100.593,11.962 100.862,11.962 v1(100.9,12)
  L6 BOT w0.28: R150.1@100.875,12.5 100.888,12.487 100.888,12.012 v1(100.9,12)
HEATER_PWM_4: P1.100 R154.1 | length 22.7
  L1 TOP w0.15: P1.100@82.825,26.61 82.825,25.777 83,25.602
  L1 TOP w0.2: 83,25.602 84.4,24.202 v1(84.4,24.2)
  L3 SIGNAL w0.2: v1(84.4,24.2) 86.5,24.2 89.6,21.1 91.386,21.1 91.7,21.414 91.7,21.636 92.014,21.95 95.987,21.95 96.757,21.18 100.784,21.18 v1(101.201,21.598)
  L6 BOT w0.28: R154.1@101.175,22.2 101.188,22.187 101.188,21.611 v1(101.201,21.598)
I2C4_SCL: P1.32 R217.2 R271.2 R297.1 | length 60.3
  L1 TOP w0.15: 69.225,25.1 P1.32@69.225,26.61
  L1 TOP w0.2: 69.225,25.1 69.225,24.129 69.5,23.854 v1(69.5,23.8)
  L1 TOP w0.28: v1(39.2,6.5) 40.24,5.46 40.585,5.46 40.845,5.2 R271.2@40.875,5.2 ; v1(42.6,7.6) 42.632,7.6 42.832,7.8 43.758,7.8 44.958,6.6 45.393,6.6 45.88,7.087 45.88,9.877 45.71,10.047 45.71,10.208 45.7,10.218 v1(45.7,13) 45.723,13.023 46.298,13.023 R217.2@46.375,13.1
  L3 SIGNAL w0.28: v1(39.2,6.5) 39.206,6.506 39.82,6.506 39.997,6.683 40.751,6.683 40.824,6.61 41.61,6.61 v1(42.6,7.6) ; v1(45.7,13) 45.723,13.023 45.939,13.023 46.026,13.11 54.742,13.11 55.122,13.49 57.322,13.49 58.202,12.61 64.488,12.61 65.731,13.854 70.246,13.854 71.49,15.097 71.49,16.738 67.91,20.318 67.91,24.003 68.197,24.29 69.01,24.29 v1(69.5,23.8)
  L6 BOT w0.2: R297.1@69.5,23.025 v1(69.5,23.8)
I2C4_SDA: P1.30 R218.2 R272.2 R298.1 | length 59.5
  L1 TOP w0.15: 68.825,25.1 P1.30@68.825,26.605
  L1 TOP w0.2: v1(68.4,23.8) 68.825,24.225 68.825,25.1
  L1 TOP w0.28: v1(38.9,5.9) 40.346,4.454 40.721,4.454 R272.2@40.875,4.3 ; v1(42.936,7.16) 43.719,7.16 44.779,6.1 45.572,6.1 46.482,7.011 46.482,10.323 46.757,10.048 46.759,10.048 47.207,9.6 v1(48.5,9.6)
  L3 SIGNAL w0.28: v1(38.9,5.9) 39.8,5.9 39.997,5.703 41.479,5.703 v1(42.936,7.16) ; v1(48.5,9.6) 53.83,9.6 54.22,9.21 59.517,9.21 59.997,9.69 60.51,9.69 61.61,8.59 67.383,8.59 71.97,13.177 71.97,16.937 68.4,20.507 v1(68.4,23.8)
  L6 BOT w0.2: v1(68.4,23.8) 68.4,23.79 68.6,23.59 R298.1@68.6,23.025
JTAG_HDR_10: J20.10 R244.2 | length 14.8
  L1 TOP w0.28: J20.10@38.2,37.92 40.18,37.92 41.2,36.9 v1(41.2,35.7)
  L6 BOT w0.28: v1(41.2,35.7) 45.6,31.3 45.6,28.7 45.061,28.161 44.561,28.161 R244.2@44.525,28.125
JTAG_RST: J20.9 R246.1 U31.2 | length 11.6
  L1 TOP w0.28: J20.9@38.2,35.38 40.182,35.38 40.339,35.223 40.377,35.223 v1(40.4,35.2)
  L6 BOT w0.28: v1(40.4,35.2) 40.4,35.168 40.71,34.858 40.71,34.597 41,34.307 41,31.9 41.9,31 42.9,31 43.475,30.425 R246.1@43.475,29.125 43.375,29.025 U31.2@42.14,29.025
JTAG_TCK: J20.3 P1.73 | length 45.9
  L1 TOP w0.15: P1.73@77.625,29.69 77.625,30.689 77.936,31
  L1 TOP w0.2: 77.936,31 78.6,31.664 v1(78.6,31.7)
  L1 TOP w0.28: v1(41.7,32.9) 43.601,32.9 J20.3@43.661,32.84
  L3 SIGNAL w0.2: v1(41.7,32.9) 46.364,32.9 46.514,32.75 54.214,32.75 54.439,32.975 55.76,32.975 56.235,33.45 65.386,33.45 67.718,31.118 67.718,31 67.718,30.762 69.88,28.6 73.088,28.6 73.218,28.47 74.982,28.47 75.641,29.129 77.073,29.129 78.6,30.656 78.6,31 v1(78.6,31.7)
JTAG_TDI: J20.7 P1.71 | length 48.7
  L1 TOP w0.15: P1.71@77.225,29.69 77.225,30.448 77.325,30.548 77.325,30.989 77.336,31
  L1 TOP w0.2: 77.336,31 78,31.664 v1(78,31.7)
  L1 TOP w0.28: J20.7@38.2,30.3 39.152,30.3 40.5,31.648 v1(40.5,33.8)
  L3 SIGNAL w0.2: v1(40.5,33.8) 53.034,33.8 53.109,33.875 65.589,33.875 68.344,31.12 68.632,31.12 68.752,31 70.752,29 73.253,29 73.383,28.87 74.817,28.87 75.475,29.529 76.907,29.529 78,30.622 78,31 v1(78,31.7)
JTAG_TDO: J20.5 P1.67 | length 43.3
  L1 TOP w0.15: P1.67@76.425,29.69 76.425,30.409 76.421,30.413 76.421,30.881 76.54,31
  L1 TOP w0.2: 76.54,31 76.79,31.25 76.95,31.25 v1(77.4,31.7)
  L1 TOP w0.28: J20.5@43.661,37.92 44.613,37.92 45.8,36.733 v1(45.8,34.3)
  L3 SIGNAL w0.2: v1(45.8,34.3) 67.036,34.3 68.65,32.686 68.65,32.014 69.664,31 71.264,29.4 73.419,29.4 73.549,29.27 74.651,29.27 75.31,29.929 76.741,29.929 77.4,30.588 77.4,31 v1(77.4,31.7)
JTAG_TMS: J20.1 P1.65 | length 50.3
  L1 TOP w0.15: P1.65@76.025,29.69 76.025,31
  L1 TOP w0.2: 76.025,31 76.025,31.051 76.674,31.7 v1(76.7,31.7)
  L1 TOP w0.28: v1(41.2,34.8) 41.2,31.669 40.81,31.279 40.81,29.658 42.708,27.76 J20.1@43.661,27.76
  L3 SIGNAL w0.2: v1(41.2,34.8) 41.75,35.35 57.514,35.35 58.164,34.7 67.236,34.7 69.623,32.313 69.623,32.057 70.68,31 71.88,29.8 73.585,29.8 73.715,29.67 74.485,29.67 75.445,30.63 75.63,30.63 76,31 v1(76.7,31.7)
LASER_ADC_1: C19.1 P2.91 R71.1 | length 90
  L1 TOP w0.2: P2.91@79.179,53.22 79.179,53.594 79.646,54.062 79.762,54.062 v1(79.8,54.1)
  L1 TOP w0.28: R71.1@125.125,13 125.87,13 128.35,15.48 128.35,43.05 v1(126,45.4)
  L3 SIGNAL w0.28: v1(79.8,54.1) 80.4,54.7 82.175,56.475 96.832,56.475 98.117,55.19 104.466,55.19 106.505,53.15 109.684,53.15 112.21,50.624 112.21,50.093 116.476,45.827 116.533,45.77 116.95,45.77 118.018,44.702 121.475,44.702 125.302,44.702 v1(126,45.4)
  L6 BOT w0.2: v1(79.8,54.1) 80.107,53.793 80.107,53.418 C19.1@80.2,53.325
LASER_ADC_2: C65.1 P2.89 R97.1 | length 98.6
  L1 TOP w0.2: P2.89@78.779,53.22 78.779,53.87 79.459,54.55 81.096,54.55 81.146,54.5 v1(81.2,54.5)
  L1 TOP w0.28: R97.1@125.125,12.1 125.87,12.1 128.83,15.06 128.83,43.87 v1(126.5,46.2)
  L3 SIGNAL w0.28: v1(81.2,54.5) 80.31,53.61 79.597,53.61 79.31,53.897 79.31,54.303 79.707,54.7 81.962,56.955 98.342,56.955 99.627,55.67 104.664,55.67 106.704,53.63 110.363,53.63 115.983,48.01 115.983,46.999 116.476,46.506 116.598,46.384 117.015,46.384 118.216,45.182 118.954,45.182 119.247,45.475 121.475,45.475 122.126,45.475 122.851,46.2 v1(126.5,46.2)
  L6 BOT w0.28: C65.1@81.1,53.325 81.2,53.425 v1(81.2,54.5)
LASER_DAC_CS: R67.1 R86.2 U10.15 | length 63
  L1 TOP w0.28: R67.1@125.125,20.2 R86.2@125.125,19.3 v1(127.6,19.3)
  L6 BOT w0.28: U10.15@112.07,57.475 113.417,57.475 114.522,58.58 115.388,58.58 115.558,58.75 122.159,58.75 122.579,58.33 128.17,58.33 130.6,55.9 130.6,47.2 128.82,45.42 128.82,33.609 129.53,32.899 129.53,31.57 130.74,30.36 130.74,22.457 127.6,19.317 v1(127.6,19.3)
LASER_DAC_LATCH: R68.1 R87.2 U10.18 | length 53.7
  L1 TOP w0.28: R87.2@125.125,18.4 R68.1@125.125,17.5 v1(126.1,17.5)
  L6 BOT w0.28: U10.18@112.07,55.525 112.135,55.46 112.969,55.46 115,53.429 115,50.064 115.164,49.9 116.893,49.9 117.293,49.5 121.5,49.5 122.4,48.6 124.796,48.6 127.38,46.016 127.38,33.013 128.09,32.303 128.09,30.11 129.3,28.9 129.3,23.4 126.1,20.2 v1(126.1,17.5)
LASER_SW_EXT_CS: R94.1 R255.2 U10.16 | length 66
  L1 TOP w0.28: R255.2@125.125,14.8 R94.1@125.125,13.9 v1(125.9,13.9)
  L6 BOT w0.28: U10.16@112.07,56.825 113.446,56.825 114.721,58.1 115.587,58.1 115.757,58.27 121.96,58.27 122.38,57.85 127.629,57.85 129,56.479 129,46.279 128.34,45.619 128.34,33.411 129.05,32.701 129.05,31.071 130.26,29.861 130.26,22.656 127.11,19.506 127.11,14.064 126.946,13.9 v1(125.9,13.9)
LASER_SW_INT_CS: R69.1 R88.2 U10.17 | length 62.7
  L1 TOP w0.2: R88.2@125.125,15.7 R69.1@125.125,16.6
  L1 TOP w0.28: R88.2@125.125,15.7 v1(126,15.7)
  L6 BOT w0.28: U10.17@112.07,56.175 113.475,56.175 114.92,57.62 115.786,57.62 115.956,57.79 121.761,57.79 122.181,57.37 127.43,57.37 128.52,56.28 128.52,46.478 127.86,45.818 127.86,33.212 128.57,32.502 128.57,30.63 129.78,29.42 129.78,22.854 126.59,19.664 126.59,16.29 v1(126,15.7)
LED_GND_1: C207.1 C208.1 D28.2 J23.1 L8.2 | length 14.3
  L1 TOP w0.5: C207.1@106.725,43.5 C208.1@106.725,44.6 106.775,44.65 106.8,44.65 107.425,45.275 109.284,45.275 110.181,46.172 110.181,46.222 109.103,47.3 v1(108.7,47.3) ; L8.2@107.73,53.3 107.73,52.2 109.33,50.6 v1(109.5,50.6)
  L6 BOT w0.5: v1(108.7,47.3) 108.7,49.8 v1(109.5,50.6)
LED_nLDAC: R264.1 U10.20 U36.8 | length 24.6
  L1 TOP w0.28: U36.8@99.025,51.21 99.108,51.127 100.273,51.127 101.455,49.945 101.455,43.576 99.954,42.075 99.954,41.879 R264.1@99.8,41.725
  L6 BOT w0.28: v1(100.9,50.5) 103,50.5 103.3,50.8 104.943,50.8 105.223,51.08 107.226,51.08 107.246,51.1 107.821,51.1 110.881,54.16 112.005,54.16 U10.20@112.07,54.225
LED_P_1: C207.2 C208.2 D28.1 J23.2 R267.1 U37.3 | length 16.5
  L1 TOP w0.5: U37.3@104.135,55.535 104.137,55.533 105.222,55.533 105.7,55.055 105.7,50.55 107,49.25 R267.1@107,49 107,47.3 ; C207.2@105.675,43.5 C208.2@105.675,44.6 105.675,45.575 106.096,45.996 106.62,45.996 106.82,46.196 D28.1@106.82,46.2 107,46.38 107,47.3 ; v1(107.7,47.3) 107,47.3
  L6 BOT w0.5: J23.2@107.375,48.25 107.525,48.1 107.525,47.475 v1(107.7,47.3)
LED_SPI_nCS: R260.2 U10.21 U36.3 | length 21.6
  L1 TOP w0.28: R260.2@100.8,41.725 100.848,41.773 100.848,42.248 101.935,43.335 101.935,45.603 102.3,45.968 102.3,47.4 v1(102.2,47.5) ; v1@102.391,47.5 102.65,47.241 102.65,46.77 103.29,46.13 U36.3@103.975,46.13
  L6 BOT w0.28: v1(102.2,47.5) 102.223,47.523 102.716,47.523 103.458,48.265 103.458,48.924 103.834,49.3 106.7,49.3 110.91,53.51 112.005,53.51 U10.21@112.07,53.575
NetC1_1: C1.1 D3.1 L1.1 U1.8 | length 5.7
  L1 TOP w0.28: U1.8@32.255,52.9 33.236,52.9 33.4,53.064 33.4,56.93 33.85,57.38 C1.1@33.85,57.4
  other v1: 32.5,50.9 33.7,50.9 33.7,51.7 33.7,52.5
NetC1_2: C1.2 U1.1 | length 1.7
  L1 TOP w0.28: U1.1@32.255,58.3 32.405,58.45 C1.2@33.85,58.45
NetC8_2: C8.2 U2.10 | length 1.8
  L1 TOP w0.25: C8.2@9.193,56.14 9.193,55.508 9.776,54.925 9.776,54.599 U2.10@9.801,54.574
NetC9_2: C9.2 U2.7 | length 3.5
  L1 TOP w0.25: 11.201,55.1 U2.7@11.201,54.574 11.201,55.1 ; 11.201,55.1 11.672,55.571 ; 11.201,55.1 11.672,55.571 ; 11.672,55.571 C9.2@11.672,56.119 ; 11.672,55.571 C9.2@11.672,56.119 ; C9.2@11.672,56.119 C9.2@11.693,56.14 C9.2@11.672,56.119
NetC14_2: C14.2 U3.10 | length 1.8
  L1 TOP w0.25: C14.2@18.693,37.24 18.693,36.608 19.276,36.025 19.276,35.699 U3.10@19.301,35.674
NetC15_2: C15.2 U3.7 | length 1.8
  L1 TOP w0.25: U3.7@20.701,35.674 20.701,36.2 21.172,36.671 21.172,37.219 C15.2@21.193,37.24
NetC16_2: C16.2 U4.10 | length 1.8
  L1 TOP w0.25: C16.2@9.193,37.24 9.193,36.608 9.776,36.025 9.776,35.699 U4.10@9.801,35.674